# Altium PCB cw312_xc7a35t.PcbDoc (part 1 of 2)
Units mm, origin at the board's own origin, x right, y up, seen from the top; angles counter-clockwise.
Board outline 58.68 x 53.69 mm, 4 copper layers (Top Layer, Layer 1, Layer 2, Bottom Layer), stack 0.603 mm thick; 60 components, 62 nets, 545 pads, 207 vias.
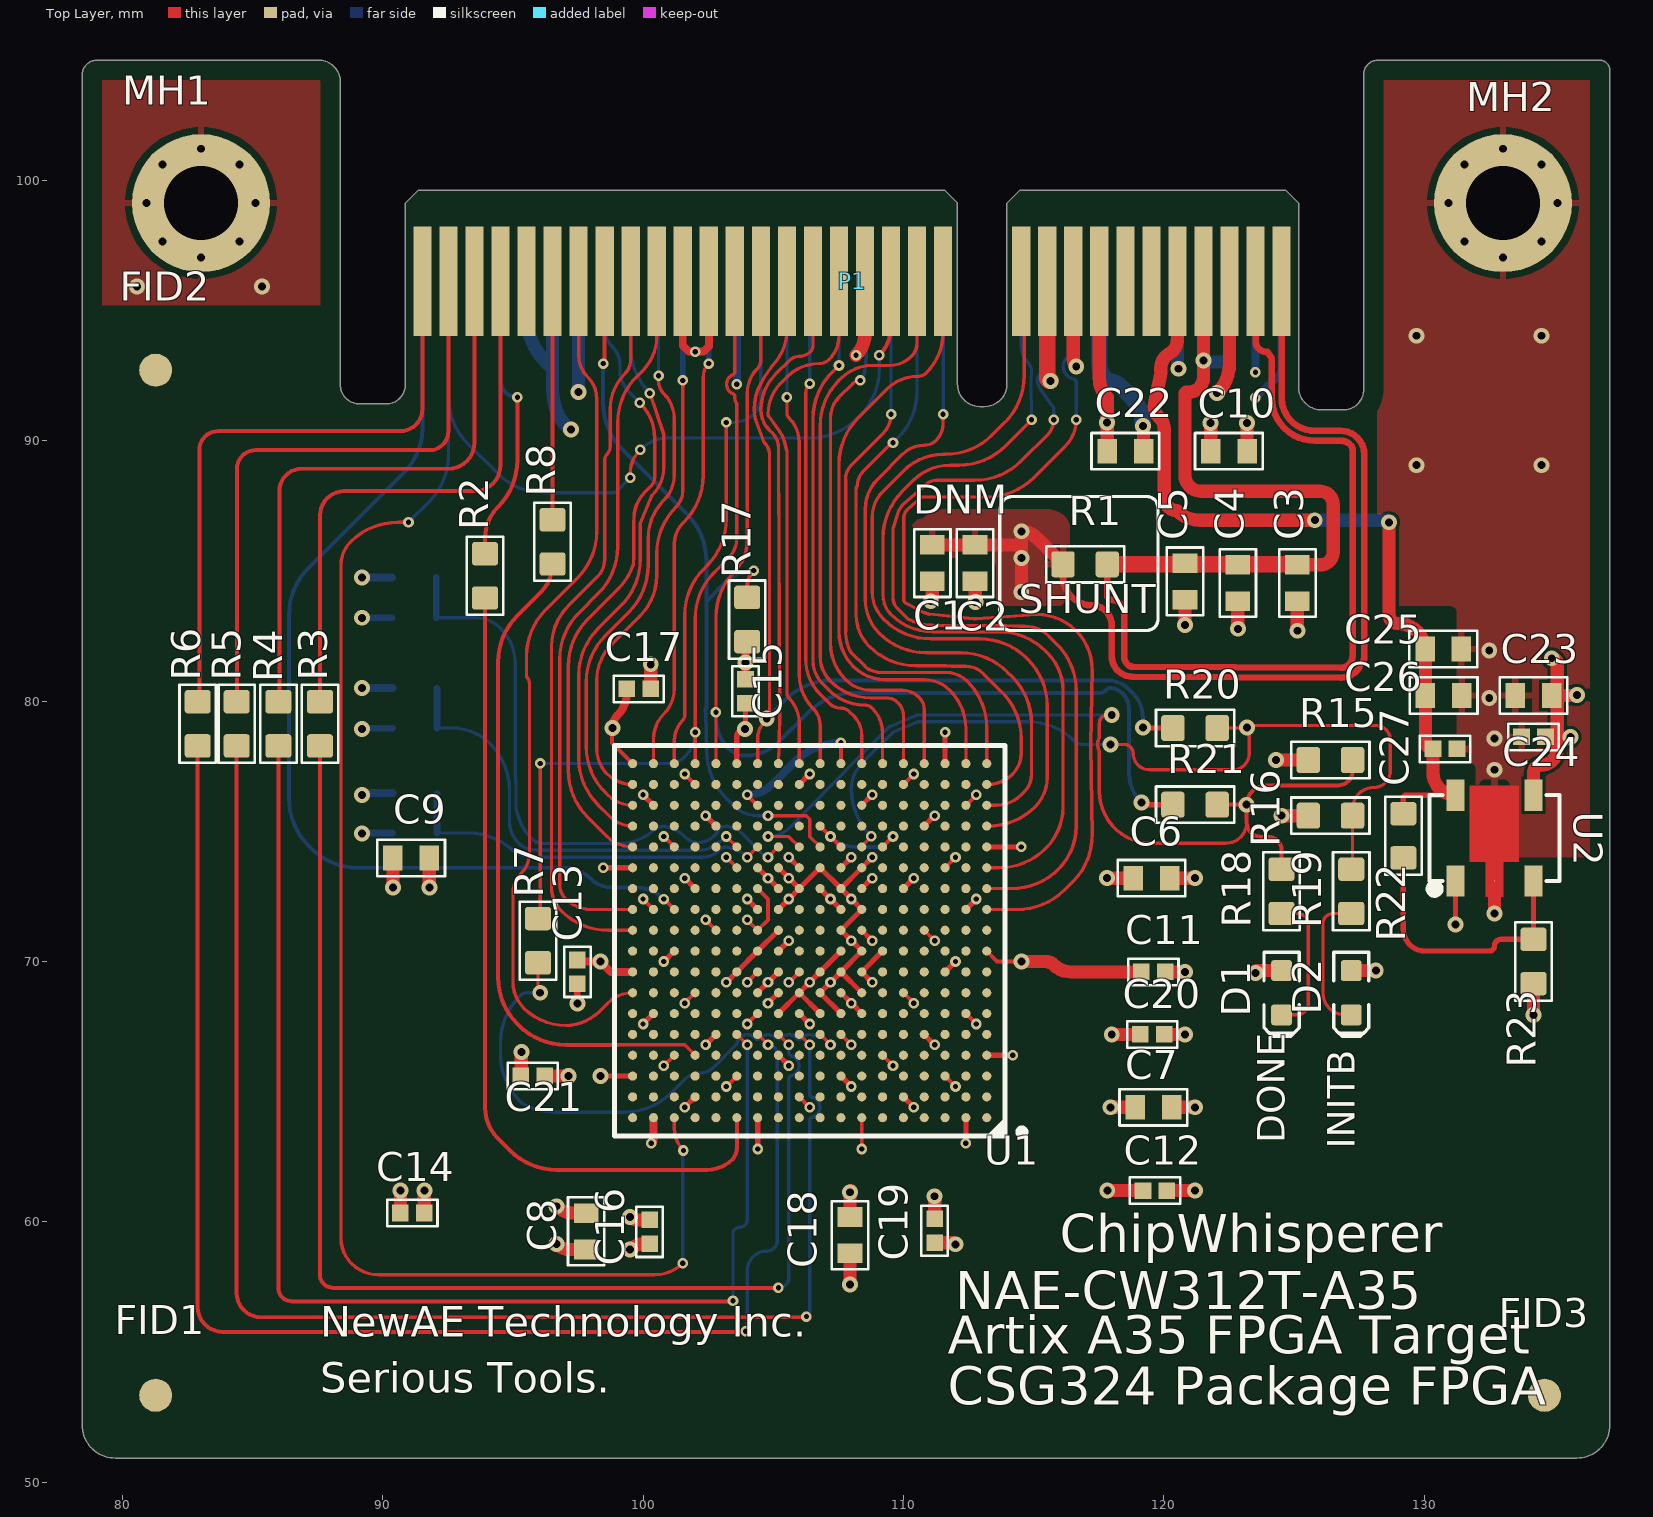
[diagram p0: Top Layer view]
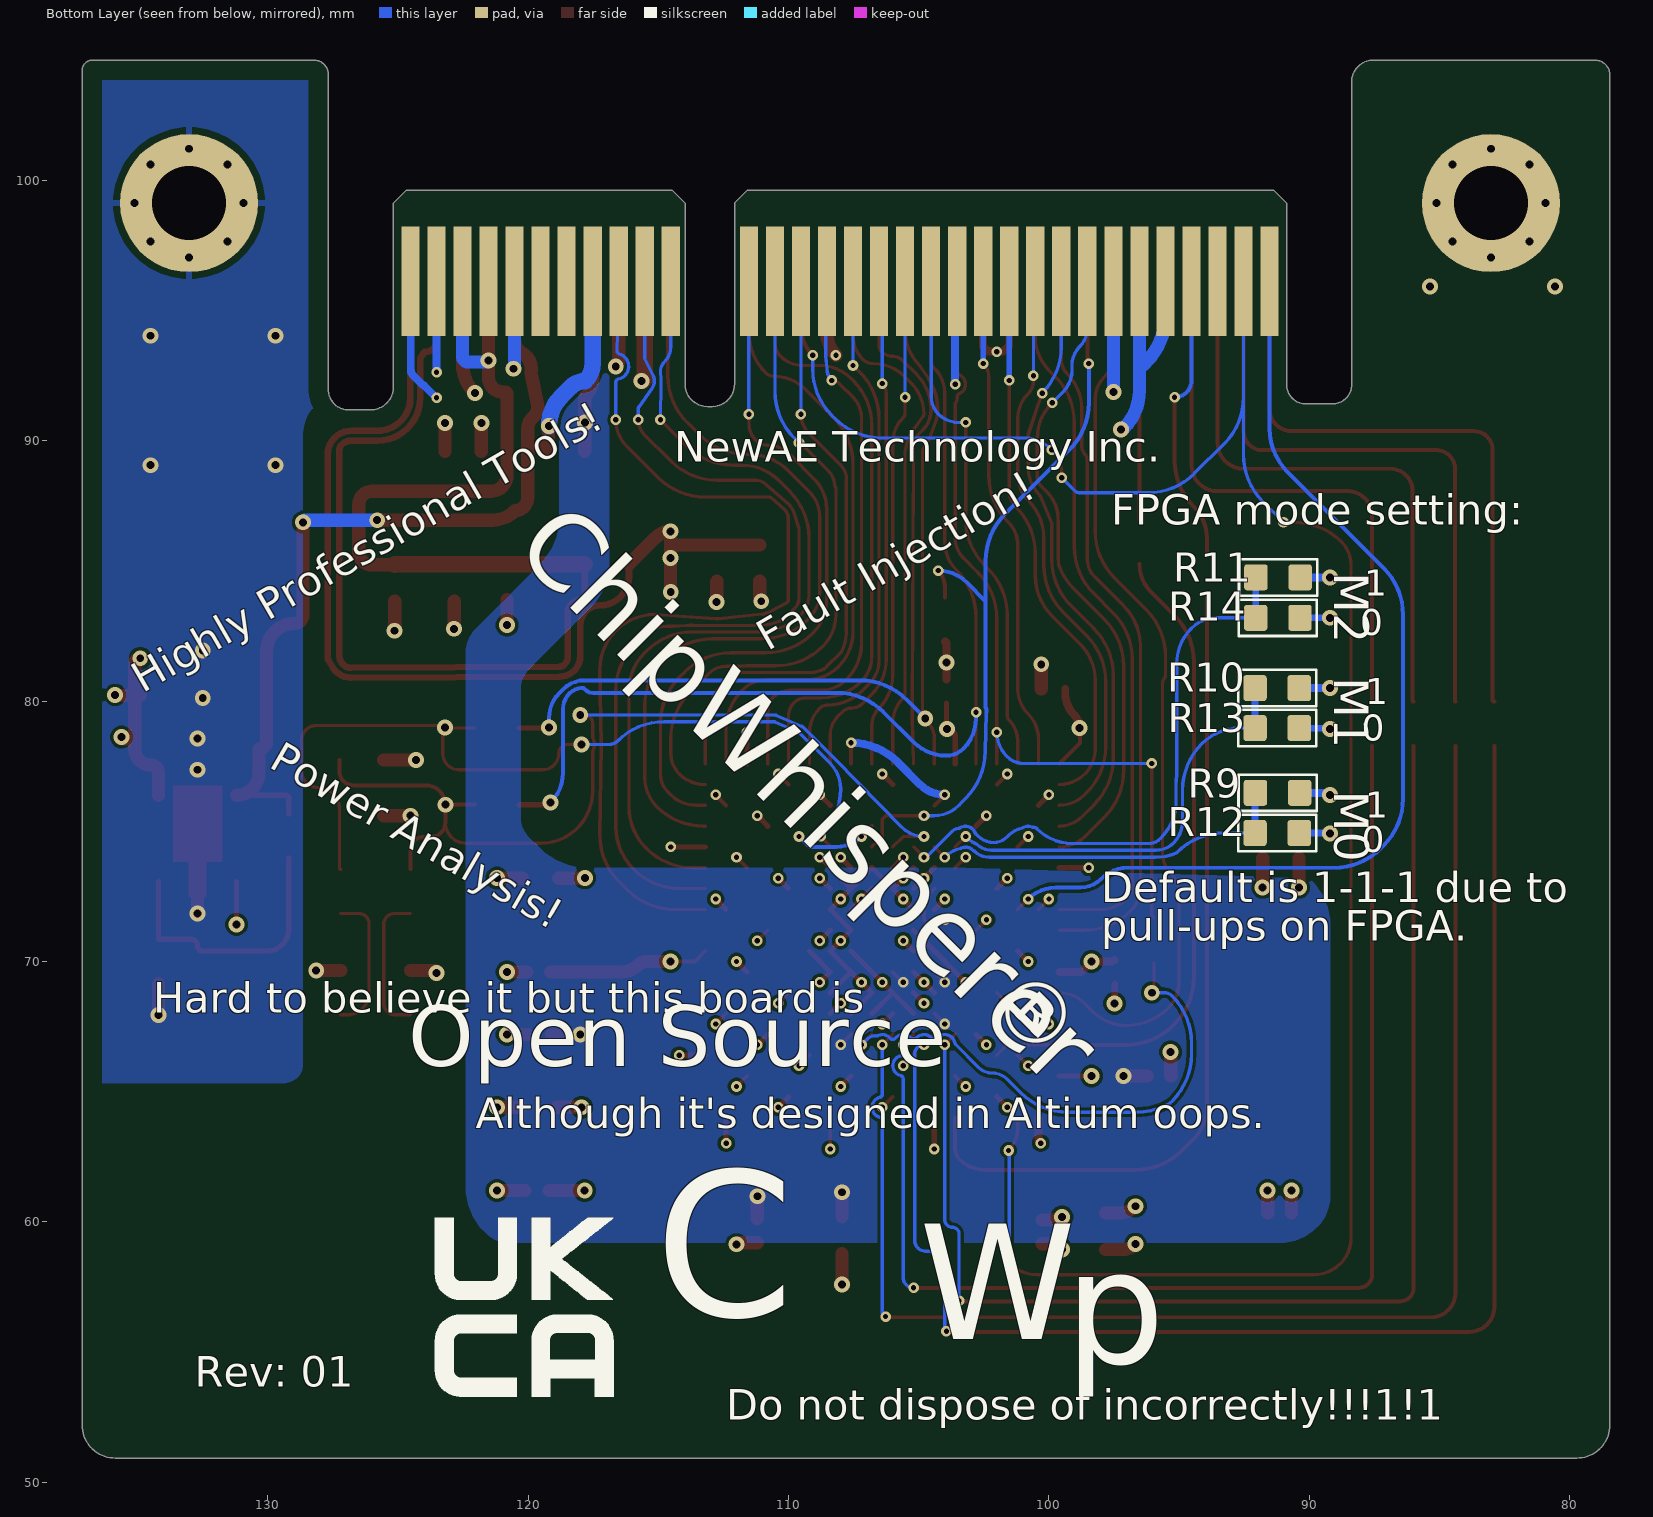
[diagram p1: Bottom Layer view, seen from below]
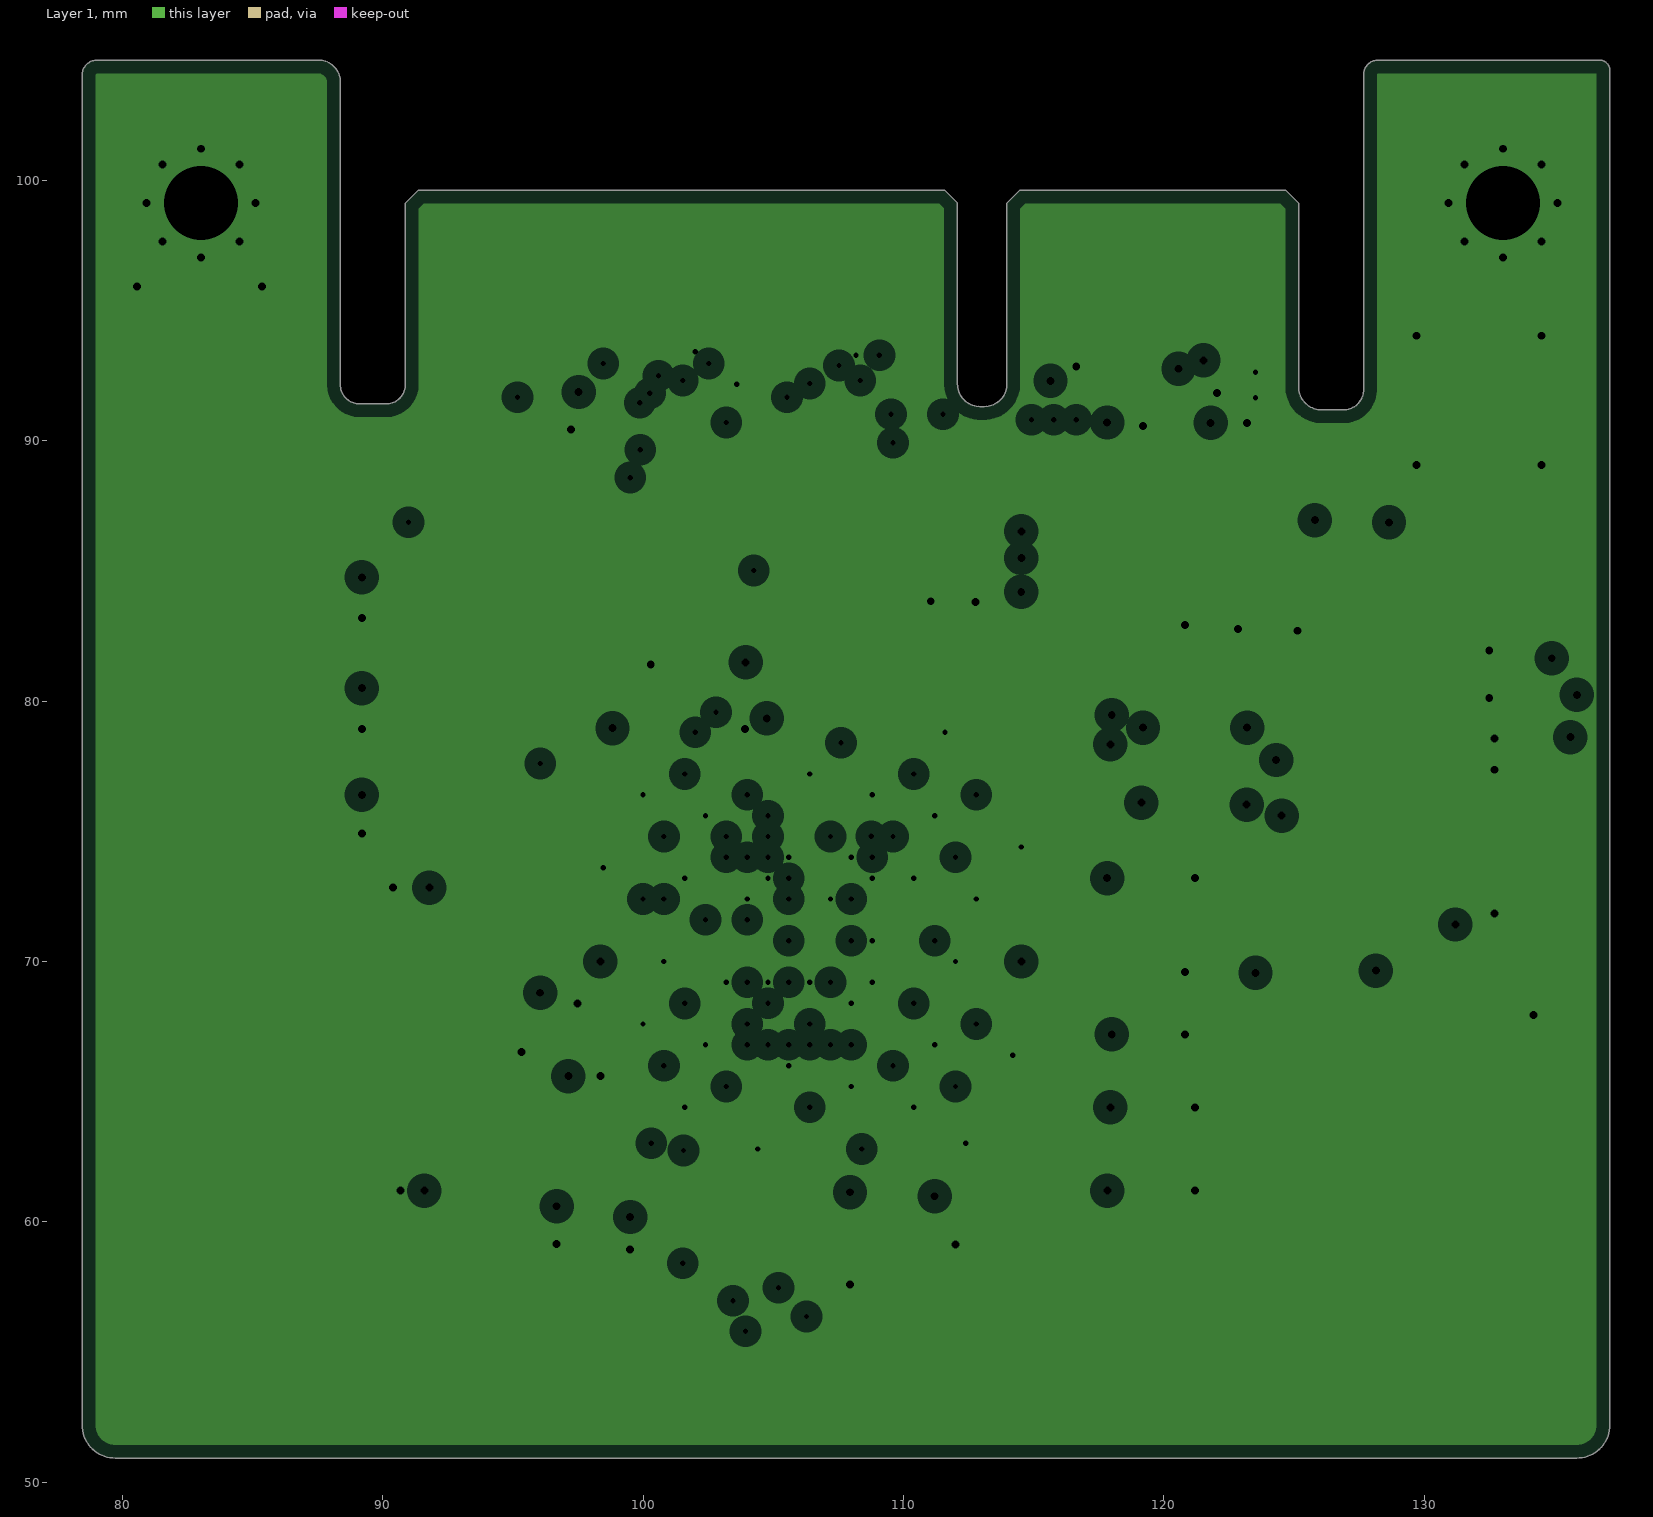
[diagram p2: Layer 1, clearances drawn from the general rule]
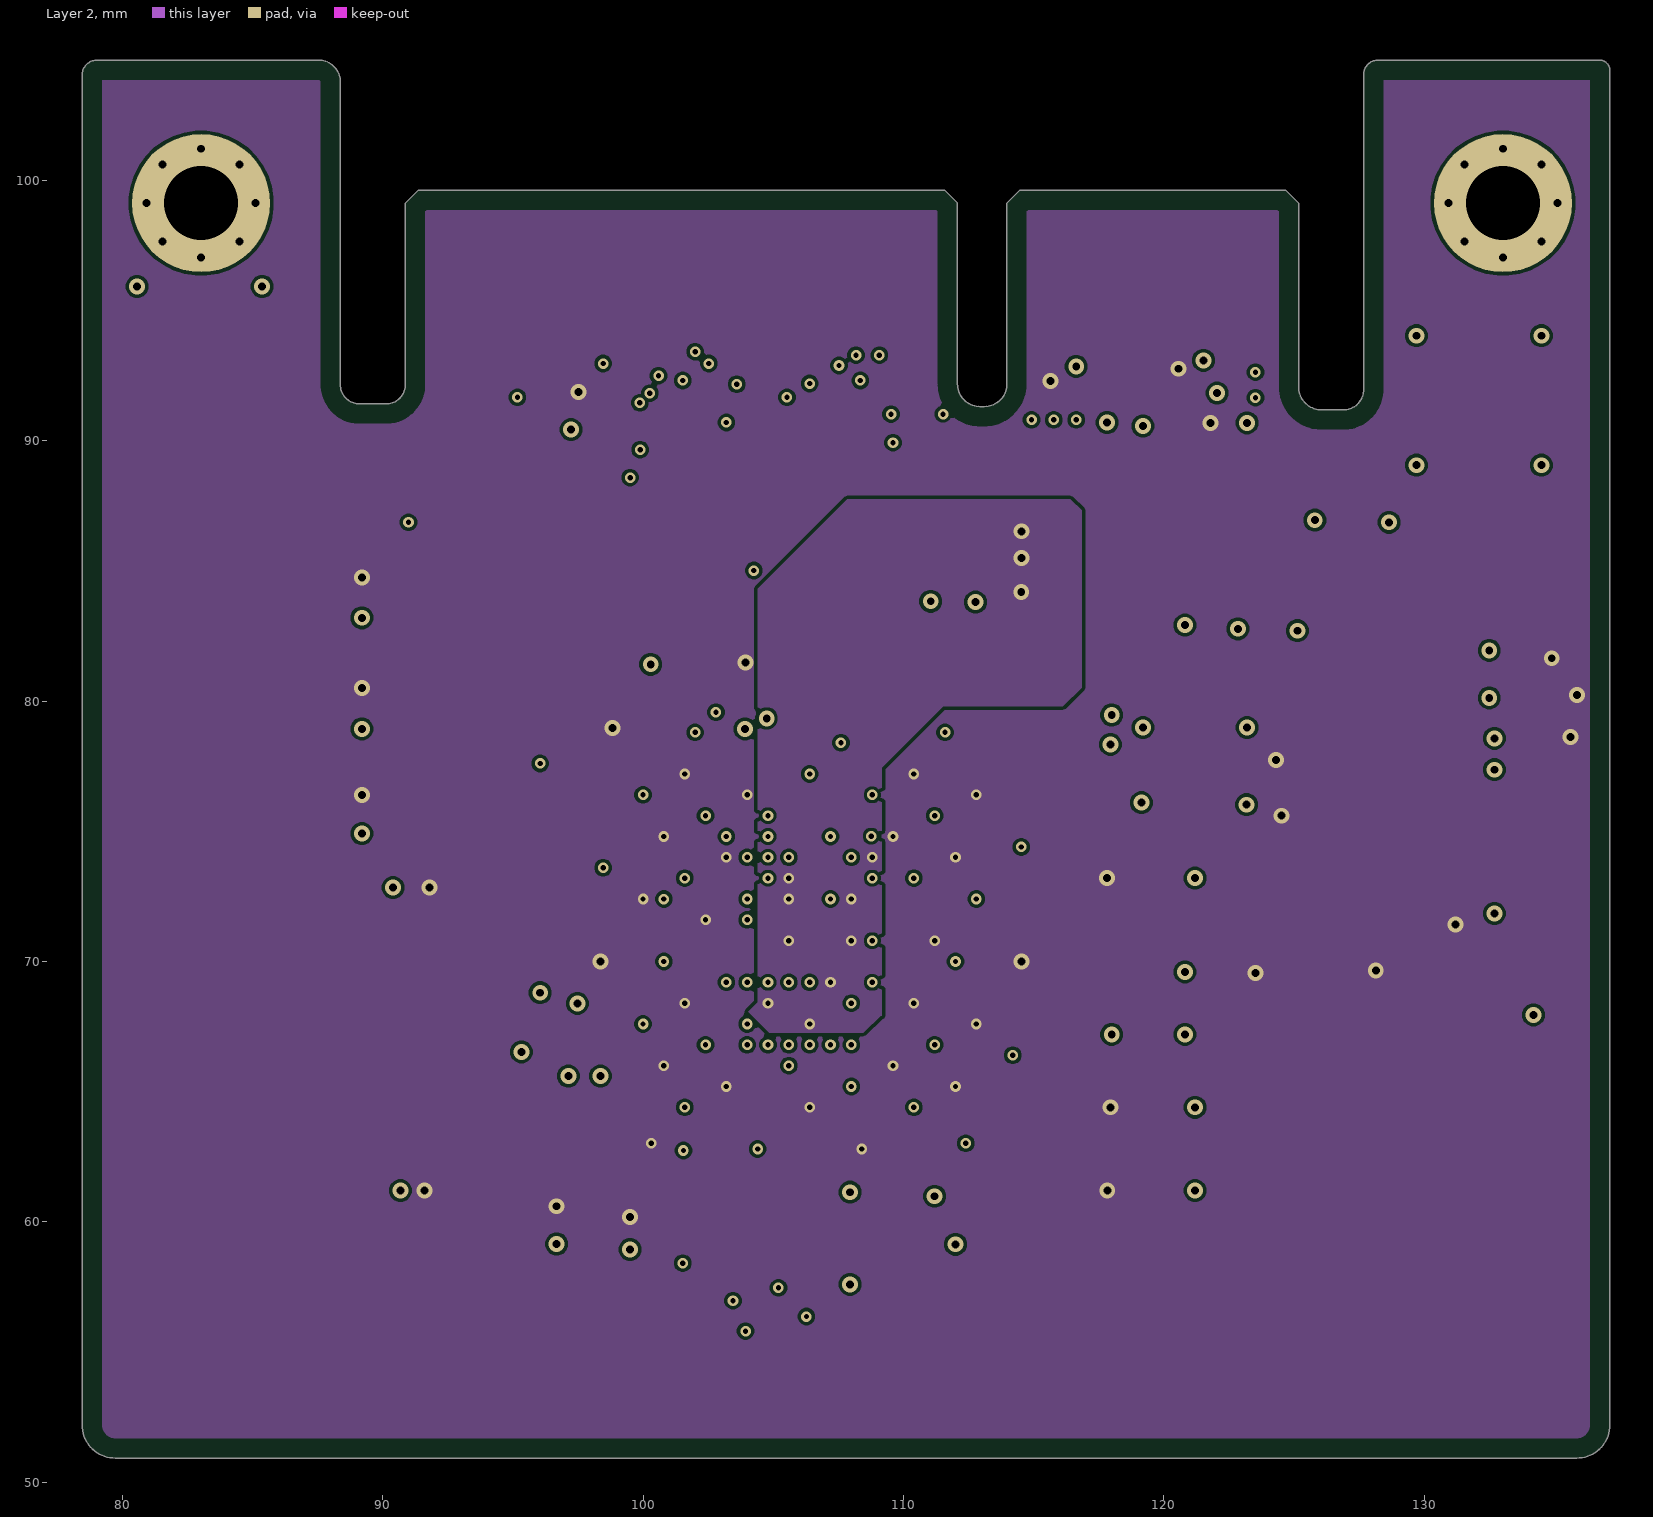
[diagram p3: Layer 2]
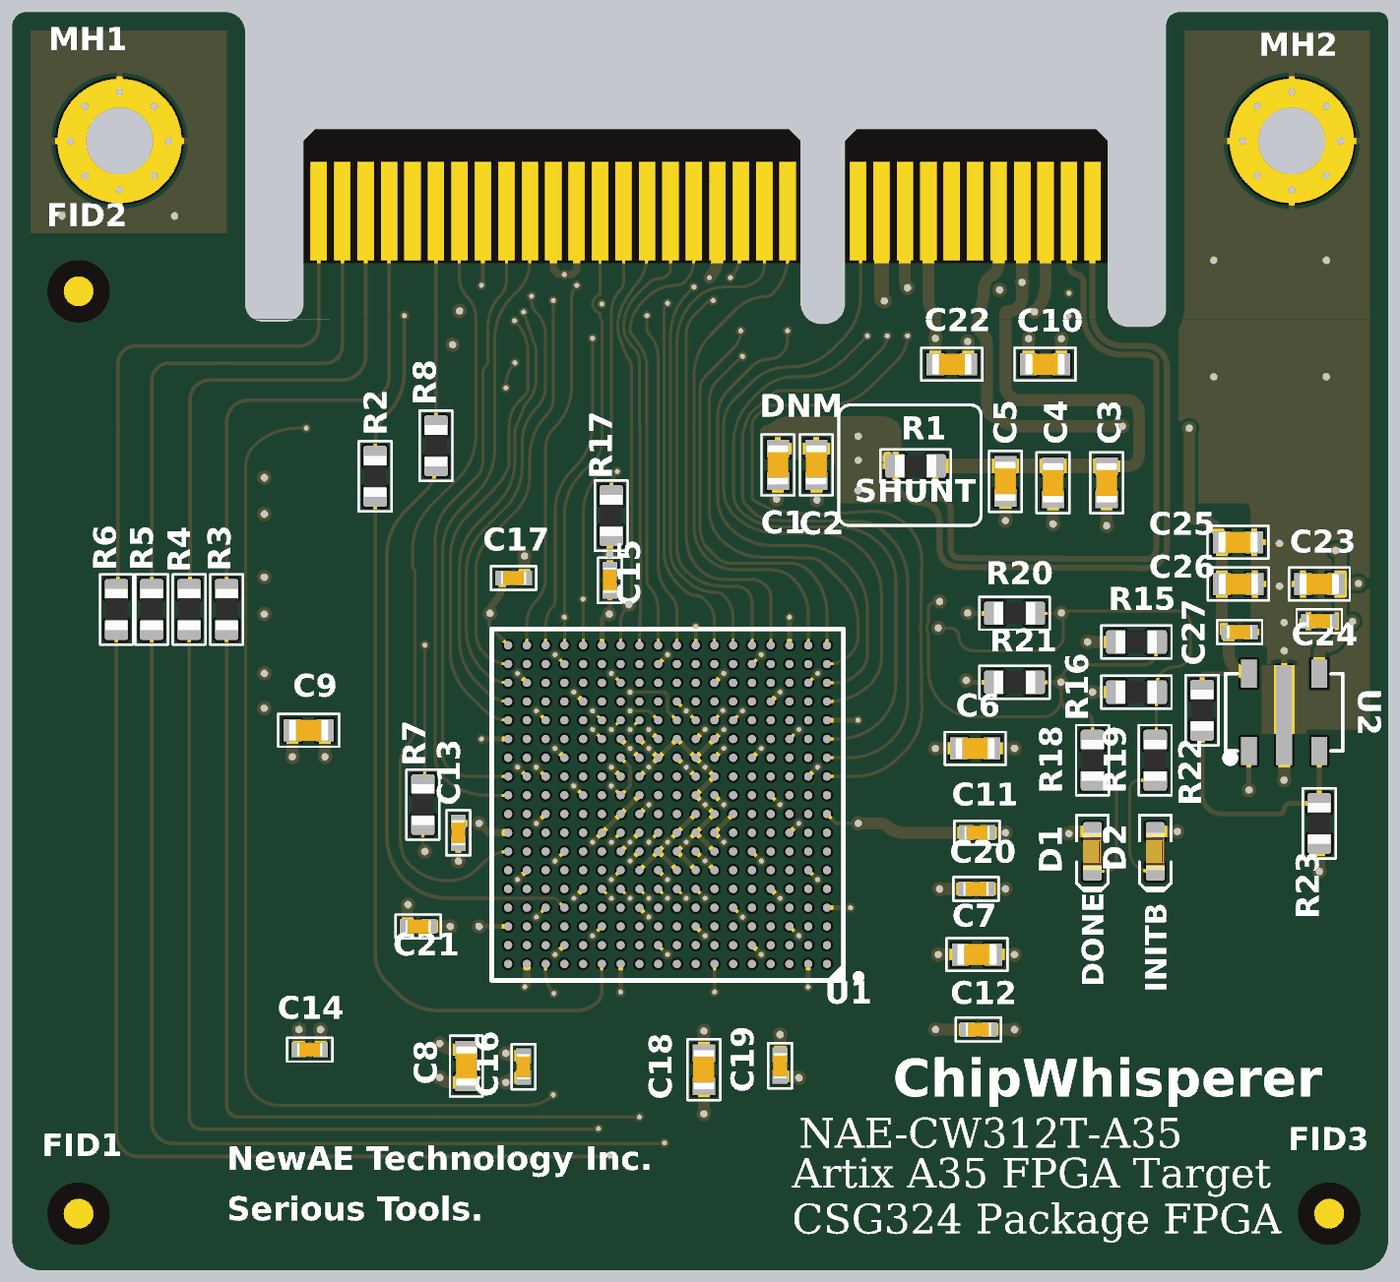
[diagram p5: 3D render of the assembled board from above, using the file's embedded part models]
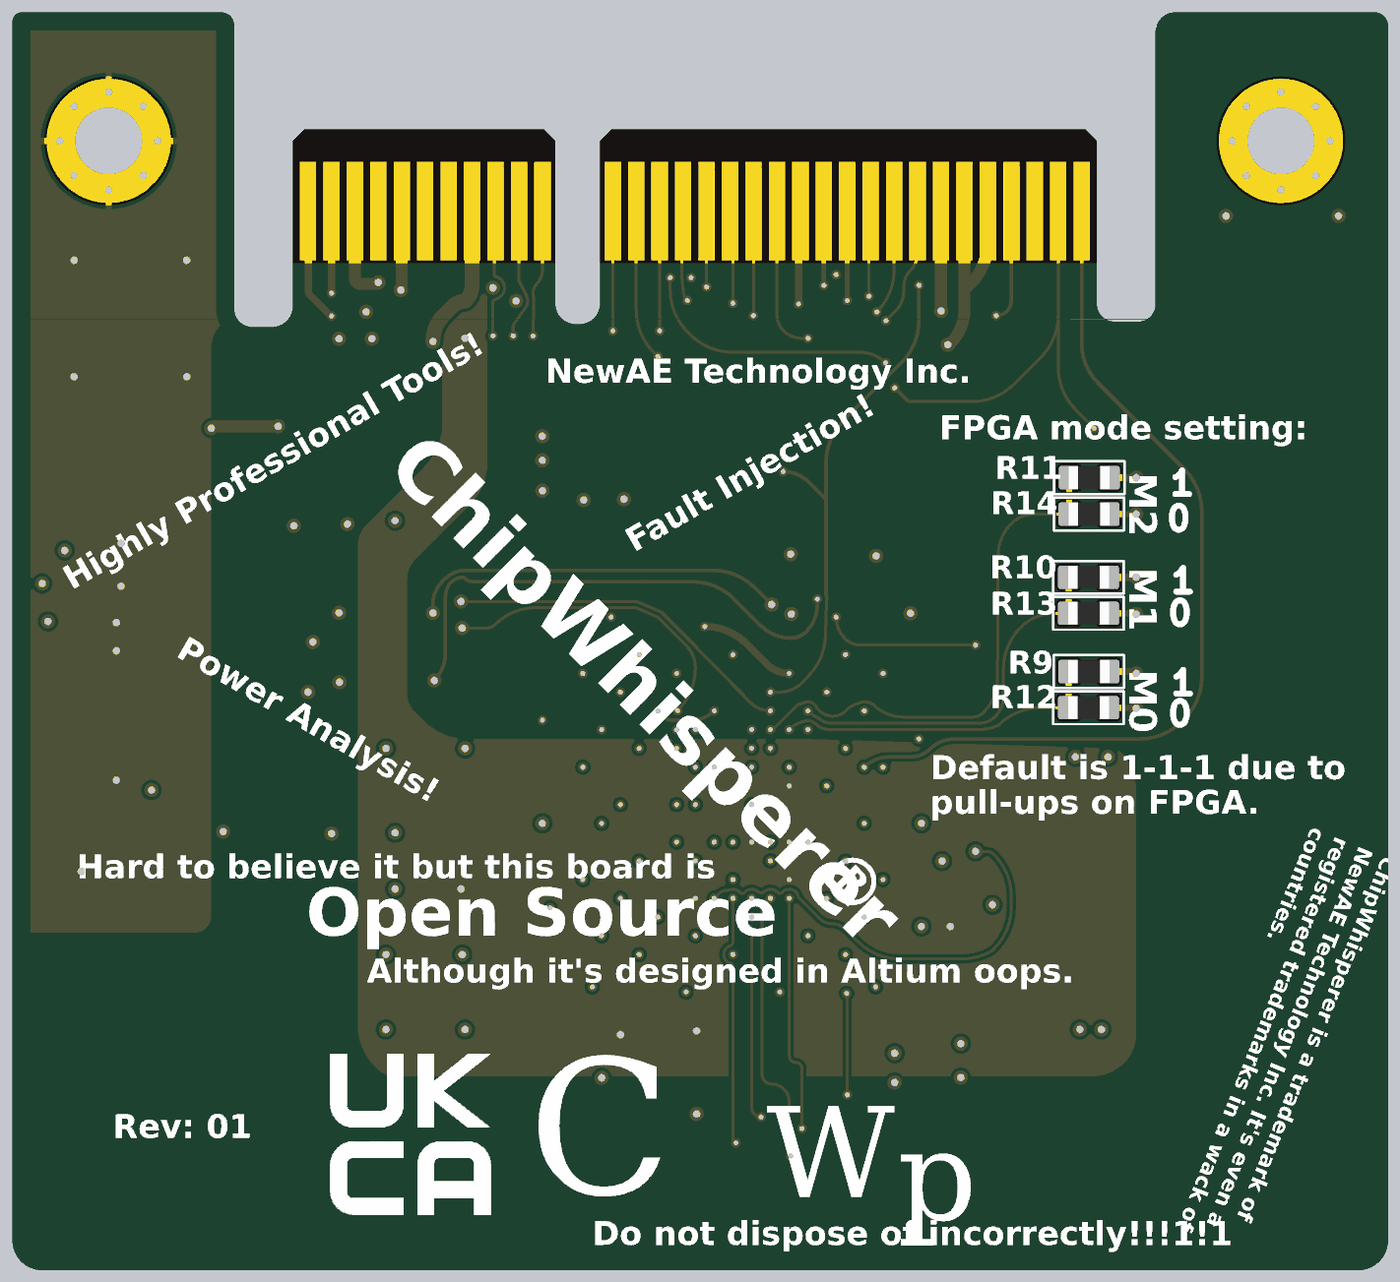
[diagram p6: 3D render of the assembled board from below, using the file's embedded part models]

## Layer stack, top to bottom
Top Solder: solder mask 0.0102, Solder Resist, Dk 3.5
Top Layer: signal copper 0.0356
Dielectric 2: prepreg 0.0711, PP-006, Dk 4.1
Layer 1: plane copper 0.035, net GND
Dielectric 1: dielectric 0.32, FR-4, Dk 4.8
Layer 2: signal copper 0.035
Dielectric 3: prepreg 0.0711, PP-006, Dk 4.1
Bottom Layer: signal copper 0.0356
Bottom Solder: solder mask 0.0102, Solder Resist, Dk 3.5

## Board outline
78.457,52.197 ccw(c79.727,52.197) 79.727,50.927 135.862,50.927 ccw(c135.862,52.197) 137.132,52.197 137.132,104.218 ccw(c136.732,104.218) 136.732,104.618 128.232,104.618 ccw(c128.232,104.061) 127.675,104.061 127.675,91.961 cw(c126.9,91.961) 126.9,91.186 126.064,91.186 cw(c126.064,92.075) 125.175,92.075 125.175,99.127 124.675,99.627 114.475,99.627 113.975,99.127 113.975,92.177 cw(c113.111,92.177) 113.111,91.313 112.939,91.313 cw(c112.939,92.177) 112.075,92.177 112.075,99.127 111.575,99.627 91.375,99.627 90.875,99.127 90.875,92.161 cw(c90.128,92.161) 90.128,91.415 89.114,91.415 cw(c89.114,92.153) 88.375,92.153 88.375,103.775 ccw(c87.532,103.775) 87.532,104.618 79.032,104.618 ccw(c79.032,104.043) 78.457,104.043

## Design rules (kind name [scope] priority, off if disabled: settings)
BoardOutlineClearance Silk_to_Outline [(OnLayer('Top Overlay'))] p1: gap=0 ignorepadtopadclearanceinfootprint=FALSE
BoardOutlineClearance [All] p2: gap=0.762 ignorepadtopadclearanceinfootprint=FALSE except(0.127: Track-OutlineEdge Track-CavityEdge Track-CutoutEdge Track-SplitBarrior Track-SplitContinuation SMDPad-OutlineEdge SMDPad-CavityEdge SMDPad-CutoutEdge SMDPad-SplitBarrior SMDPad-SplitContinuation)
Clearance [All] p1: gap=0.127 ignorepadtopadclearanceinfootprint=FALSE
HoleSize [All] p1: absolutevalues=TRUE maxlimit=5.08 minlimit=0.025 maxpercent=80.000 minpercent=20.000
MinimumSolderMaskSliver [All] p1: minsoldermaskwidth=0.127
PlaneClearance [All] p1: clearance=0.508
PlaneConnect PlaneConnect_viaDirect [IsVia] p1: planeconnectstyle=Direct reliefexpansion=0.508 reliefentries=4 reliefconductorwidth=0.254 reliefairgap=0.254
PlaneConnect [All] p2: planeconnectstyle=Relief reliefexpansion=0.508 reliefentries=4 reliefconductorwidth=0.254 reliefairgap=0.254
PolygonConnect PolygonConnect_viaDirect [All vs isVia] p1: connectstyle=Direct reliefconductorwidth=0.254 reliefentries=4 polygonreliefangle="90 Angle" airgapwidth=0.254
PolygonConnect [All] p2: connectstyle=Relief reliefconductorwidth=0.254 reliefentries=4 polygonreliefangle="90 Angle" airgapwidth=0.254
RoutingVias [All] p1: holewidth=0.203 width=0.406 viastyle="Through Hole" minholewidth=0.203 minwidth=0.406 maxholewidth=2.54 maxwidth=5.08 useviatemplates=TRUE viatemplateguid#1={C9B3ED78-813B-49D6-9E3A-DFB12ABB6989} viatemplateguid#2={154E6A83-3B22-4FBC-87DC-4FF27CD40F8F} viatemplateguid#3={D34D7AB9-3024-4146-83E3-B5961C51509C} viatemplatename#1=v41h20 viatemplatename#2=v41h20m41 viatemplatename#3=v61h30m0mx0
SilkToSilkClearance [All] p1: silktosilkclearance=0.127
SilkToSolderMaskClearance [IsPad] p1: minsilkscreentomaskgap=0.127 clearancetoexposedcopper=TRUE
SolderMaskExpansion [All] p1: expansion=0.102 istentingtop=FALSE
Width [All] p1: maxlimit=2.54 minlimit=0.127 preferedwidth=0.254 toplayer_prefwidth=0.152 midlayer1_minwidth=0.254 midlayer1_maxwidth=0.254 bottomlayer_prefwidth=0.152 minimp=50.000000 maximp=50.000000 favimp=50.000000
24 further rules are at their usual default settings.

## Classes and differential pairs
component class cw312_xc7a35t_fpga_cfg: D1 D2 R3 R4 R5 R6 R7 R9 R10 R11 R12 R13 R14 R15 R16 R17 R18 R19
component class cw312_xc7A35t_fpga_io1: R2 R8 U1
component class cw312_xc7a35t_cardedge: C23 C24 C25 C26 C27 MH1 MH2 P1 R20 R21 R22 R23 U2
component class cw312_xc7a35t_fpga_pwr: C1 C2 C3 C4 C5 C6 C7 C8 C9 C10 C11 C12 C13 C14 C15 C16 C17 C18 C19 C20 C21 C22 C? FID1 FID2 FID3 R1 R?

## Components (designator, comment, footprint, x,y, rotation, side; value= is the part's Value field where it differs from the comment)
C1 "DNM" CAPC0603_M 111.11,85.3 r270 top value=100n
C2 "DNM" CAPC0603_M 112.745,85.3 r270 top value=100n
C3 "100n" CAPC0603_M 125.129,84.535 r270 top
C4 "100n" CAPC0603_M 122.843,84.535 r270 top
C5 "2u2" CAPC0603_M 120.811,84.6 r270 top
C6 "2u2" CAPC0603_M 119.525,73.2 r0 top
C7 "2u2" CAPC0603_M 119.6,64.4 r0 top
C8 "2u2" CAPC0603_M 97.815,59.639 r270 top
C9 "2u2" CAPC0603_M 91.092,73.971 r180 top
C10 "2u2" CAPC0603_M 122.5,89.6 r0 top
C11 "100n" CAPC0402_M 119.6,69.6 r0 top
C12 "100n" CAPC0402_M 119.66,61.2 r0 top
C13 "100n" CAPC0402_M 97.478,69.6 r270 top
C14 "100n" CAPC0402_M 91.14,60.339 r180 top
C15 "100n" CAPC0402_M 103.937,80.378 r270 top
C16 "100n" CAPC0402_M 100.254,59.617 r270 top
C17 "100n" CAPC0402_M 99.834,80.47 r0 top
C18 "2u2" CAPC0603_M 107.95,59.487 r270 top
C19 "100n" CAPC0402_M 111.2,59.659 r270 top
C20 "100n" CAPC0402_M 119.558,67.2 r0 top
C21 "100n" CAPC0402_M 95.766,65.6 r180 top
C22 "2u2" CAPC0603_M 118.525,89.6 r0 top
C23 "2u2" CAPC0603_M 134.2,80.214 r180 top
C24 "100n" CAPC0402_M 134.2,78.629 r180 top
C25 "2u2" CAPC0603_M 130.733,81.998 r0 top
C26 "2u2" CAPC0603_M 130.749,80.214 r0 top
C27 "100n" CAPC0402_M 130.8,78.166 r0 top
D1 "LED, 0603, Red" LED-0603-RED 124.525,68.8 r270 top
D2 "LED, 0603, Red" LED-0603-RED 127.2,68.8 r270 top
FID1 "FIDU-ROUND-1.0MM" FIDU-ROUND-1.0mm#1 81.153,53.34 r0 top
FID2 "FIDU-ROUND-1.0MM" FIDU-ROUND-1.0mm#2 81.549,93.049 r0 top
FID3 "FIDU-ROUND-1.0MM" FIDU-ROUND-1.0mm#3 134.239,53.594 r0 top
MH1 "4-40 MH, Tight Fit" MOUNT_#4_TIGHT 83.025,99.127 r0 top
MH2 "4-40 MH, Tight Fit" MOUNT_#4_TIGHT 133.025,99.127 r0 top
P1 "PCIeX4-GF-2D-1000-1K-O64" PCIeX4-GF-2D-1000-1K-O64 115.025,96.127 r180 top
R1 "10R" RESC1608X55N 116.98,85.255 r0 top
R2 "10R" RESC1608X55N 93.929,84.811 r270 top
R3 "10R" RESC1608X55N 87.594,79.13 r270 top
R4 "10R" RESC1608X55N 85.994,79.13 r270 top
R5 "10R" RESC1608X55N 84.394,79.13 r270 top
R6 "10R" RESC1608X55N 82.895,79.13 r270 top
R7 "10R" RESC1608X55N 95.966,70.8 r270 top
R8 "10R" RESC1608X55N 96.525,86.116 r270 top
R9 "DNM RCHIP" RESC1608X55N 91.219,76.48 r180 bottom
R10 "DNM RCHIP" RESC1608X55N 91.234,80.502 r180 bottom
R11 "DNM RCHIP" RESC1608X55N 91.201,84.755 r180 bottom
R12 "DNM RCHIP" RESC1608X55N 91.234,74.937 r0 bottom
R13 "DNM RCHIP" RESC1608X55N 91.234,78.966 r0 bottom
R14 "DNM RCHIP" RESC1608X55N 91.209,83.2 r0 bottom
R15 "4k7" RESC1608X55N 126.4,77.74 r0 top
R16 "4k7" RESC1608X55N 126.4,75.6 r0 top
R17 "4k7" RESC1608X55N 104,83.134 r90 top
R18 "1k" RESC1608X55N 124.525,72.694 r270 top
R19 "1k" RESC1608X55N 127.2,72.694 r270 top
R20 "10k" RESC1608X55N 121.2,78.966 r180 top
R21 "10k" RESC1608X55N 121.2,76.022 r180 top
R22 "DNM RCHIP" RESC1608X55N 129.2,74.828 r270 top
R23 "DNM RCHIP" RESC1608X55N 134.2,70 r270 top
U1 "XC7A35T-1CSG324C" CSG324 106.4,70.8 r180 top
U2 "AP7361C-Y5-13" SOT89-5 131.2,73.089 r0 top

## Footprints (in the part's own frame and the unit in brackets; to place one, negate y for a bottom-side part, rotate by r counter-clockwise, add the part's x,y. Pads: shape width x height; smd on the part's side, far side on the other; paste and mask are expansions set on the pad)
CAPC0402_M [mm] "Chip Capacitor, 2-Leads, Body 0402, IPC Medium Density"
  rect 0.64x0.64 smd mask+0.06: 1(-0.46,0) 2(0.46,0)
  silkscreen extent -0.97,-0.51 0.97,0.51, body extent -0.55,-0.3 0.55,0.3, height 0.6
CAPC0603_M [mm]
  rect 0.75x0.95 smd: 1(-0.7,0) 2(0.7,0)
  silkscreen extent -1.3,-0.7 1.3,0.7, body extent -0.85,-0.45 0.85,0.45, height 0.9
CSG324 [mm] "BGA, 324-Balls, Body 15x15mm, Pitch 0.8mm"
  round 0.35 smd: A1(-6.8,6.8) A2(-6,6.8) A3(-5.2,6.8) A4(-4.4,6.8) A5(-3.6,6.8) A6(-2.8,6.8) A7(-2,6.8) A8(-1.2,6.8) A9(-0.4,6.8) A10(0.4,6.8) A11(1.2,6.8) A12(2,6.8) A13(2.8,6.8) A14(3.6,6.8) A15(4.4,6.8) A16(5.2,6.8) A17(6,6.8) A18(6.8,6.8) B1(-6.8,6) B2(-6,6) B3(-5.2,6) B4(-4.4,6) B5(-3.6,6) B6(-2.8,6) B7(-2,6) B8(-1.2,6) B9(-0.4,6) B10(0.4,6) B11(1.2,6) B12(2,6) B13(2.8,6) B14(3.6,6) B15(4.4,6) B16(5.2,6) B17(6,6) B18(6.8,6) C1(-6.8,5.2) C2(-6,5.2) C3(-5.2,5.2) C4(-4.4,5.2) C5(-3.6,5.2) C6(-2.8,5.2) C7(-2,5.2) C8(-1.2,5.2) C9(-0.4,5.2) C10(0.4,5.2) C11(1.2,5.2) C12(2,5.2) C13(2.8,5.2) C14(3.6,5.2) C15(4.4,5.2) C16(5.2,5.2) C17(6,5.2) C18(6.8,5.2) D1(-6.8,4.4) D2(-6,4.4) D3(-5.2,4.4) D4(-4.4,4.4) D5(-3.6,4.4) D6(-2.8,4.4) D7(-2,4.4) D8(-1.2,4.4) D9(-0.4,4.4) D10(0.4,4.4) D11(1.2,4.4) D12(2,4.4) D13(2.8,4.4) D14(3.6,4.4) D15(4.4,4.4) D16(5.2,4.4) D17(6,4.4) D18(6.8,4.4) E1(-6.8,3.6) E2(-6,3.6) E3(-5.2,3.6) E4(-4.4,3.6) E5(-3.6,3.6) E6(-2.8,3.6) E7(-2,3.6) E8(-1.2,3.6) E9(-0.4,3.6) E10(0.4,3.6) E11(1.2,3.6) E12(2,3.6) E13(2.8,3.6) E14(3.6,3.6) E15(4.4,3.6) E16(5.2,3.6) E17(6,3.6) E18(6.8,3.6) F1(-6.8,2.8) F2(-6,2.8) F3(-5.2,2.8) F4(-4.4,2.8) F5(-3.6,2.8) F6(-2.8,2.8) F7(-2,2.8) F8(-1.2,2.8) F9(-0.4,2.8) F10(0.4,2.8) F11(1.2,2.8) F12(2,2.8) F13(2.8,2.8) F14(3.6,2.8) F15(4.4,2.8) F16(5.2,2.8) F17(6,2.8) F18(6.8,2.8) G1(-6.8,2) G2(-6,2) G3(-5.2,2) G4(-4.4,2) G5(-3.6,2) G6(-2.8,2) G7(-2,2) G8(-1.2,2) G9(-0.4,2) G10(0.4,2) G11(1.2,2) G12(2,2) G13(2.8,2) G14(3.6,2) G15(4.4,2) G16(5.2,2) G17(6,2) G18(6.8,2) H1(-6.8,1.2) H2(-6,1.2) H3(-5.2,1.2) H4(-4.4,1.2) H5(-3.6,1.2) H6(-2.8,1.2) H7(-2,1.2) H8(-1.2,1.2) H9(-0.4,1.2) H10(0.4,1.2) H11(1.2,1.2) H12(2,1.2) H13(2.8,1.2) H14(3.6,1.2) H15(4.4,1.2) H16(5.2,1.2) H17(6,1.2) H18(6.8,1.2) J1(-6.8,0.4) J2(-6,0.4) J3(-5.2,0.4) J4(-4.4,0.4) J5(-3.6,0.4) J6(-2.8,0.4) J7(-2,0.4) J8(-1.2,0.4) J9(-0.4,0.4) J10(0.4,0.4) J11(1.2,0.4) J12(2,0.4) J13(2.8,0.4) J14(3.6,0.4) J15(4.4,0.4) J16(5.2,0.4) J17(6,0.4) J18(6.8,0.4) K1(-6.8,-0.4) K2(-6,-0.4) K3(-5.2,-0.4) K4(-4.4,-0.4) K5(-3.6,-0.4) K6(-2.8,-0.4) K7(-2,-0.4) K8(-1.2,-0.4) K9(-0.4,-0.4) K10(0.4,-0.4) K11(1.2,-0.4) K12(2,-0.4) K13(2.8,-0.4) K14(3.6,-0.4) K15(4.4,-0.4) K16(5.2,-0.4) K17(6,-0.4) K18(6.8,-0.4) L1(-6.8,-1.2) L2(-6,-1.2) L3(-5.2,-1.2) L4(-4.4,-1.2) L5(-3.6,-1.2) L6(-2.8,-1.2) L7(-2,-1.2) L8(-1.2,-1.2) L9(-0.4,-1.2) L10(0.4,-1.2) L11(1.2,-1.2) L12(2,-1.2) L13(2.8,-1.2) L14(3.6,-1.2) L15(4.4,-1.2) L16(5.2,-1.2) L17(6,-1.2) L18(6.8,-1.2) M1(-6.8,-2) M2(-6,-2) M3(-5.2,-2) M4(-4.4,-2) M5(-3.6,-2) M6(-2.8,-2) M7(-2,-2) M8(-1.2,-2) M9(-0.4,-2) M10(0.4,-2) M11(1.2,-2) M12(2,-2) M13(2.8,-2) M14(3.6,-2) M15(4.4,-2) M16(5.2,-2) M17(6,-2) M18(6.8,-2) N1(-6.8,-2.8) N2(-6,-2.8) N3(-5.2,-2.8) N4(-4.4,-2.8) N5(-3.6,-2.8) N6(-2.8,-2.8) N7(-2,-2.8) N8(-1.2,-2.8) N9(-0.4,-2.8) N10(0.4,-2.8) N11(1.2,-2.8) N12(2,-2.8) N13(2.8,-2.8) N14(3.6,-2.8) N15(4.4,-2.8) N16(5.2,-2.8) N17(6,-2.8) N18(6.8,-2.8) P1(-6.8,-3.6) P2(-6,-3.6) P3(-5.2,-3.6) P4(-4.4,-3.6) P5(-3.6,-3.6) P6(-2.8,-3.6) P7(-2,-3.6) P8(-1.2,-3.6) P9(-0.4,-3.6) P10(0.4,-3.6) P11(1.2,-3.6) P12(2,-3.6) P13(2.8,-3.6) P14(3.6,-3.6) P15(4.4,-3.6) P16(5.2,-3.6) P17(6,-3.6) P18(6.8,-3.6) R1(-6.8,-4.4) R2(-6,-4.4) R3(-5.2,-4.4) R4(-4.4,-4.4) R5(-3.6,-4.4) R6(-2.8,-4.4) R7(-2,-4.4) R8(-1.2,-4.4) R9(-0.4,-4.4) R10(0.4,-4.4) R11(1.2,-4.4) R12(2,-4.4) R13(2.8,-4.4) R14(3.6,-4.4) R15(4.4,-4.4) R16(5.2,-4.4) R17(6,-4.4) R18(6.8,-4.4) T1(-6.8,-5.2) T2(-6,-5.2) T3(-5.2,-5.2) T4(-4.4,-5.2) T5(-3.6,-5.2) T6(-2.8,-5.2) T7(-2,-5.2) T8(-1.2,-5.2) T9(-0.4,-5.2) T10(0.4,-5.2) T11(1.2,-5.2) T12(2,-5.2) T13(2.8,-5.2) T14(3.6,-5.2) T15(4.4,-5.2) T16(5.2,-5.2) T17(6,-5.2) T18(6.8,-5.2) U1(-6.8,-6) U2(-6,-6) U3(-5.2,-6) U4(-4.4,-6) U5(-3.6,-6) U6(-2.8,-6) U7(-2,-6) U8(-1.2,-6) U9(-0.4,-6) U10(0.4,-6) U11(1.2,-6) U12(2,-6) U13(2.8,-6) U14(3.6,-6) U15(4.4,-6) U16(5.2,-6) U17(6,-6) U18(6.8,-6) V1(-6.8,-6.8) V2(-6,-6.8) V3(-5.2,-6.8) V4(-4.4,-6.8) V5(-3.6,-6.8) V6(-2.8,-6.8) V7(-2,-6.8) V8(-1.2,-6.8) V9(-0.4,-6.8) V10(0.4,-6.8) V11(1.2,-6.8) V12(2,-6.8) V13(2.8,-6.8) V14(3.6,-6.8) V15(4.4,-6.8) V16(5.2,-6.8) V17(6,-6.8) V18(6.8,-6.8)
  silkscreen extent -8.27,-7.5 7.5,7.5, body extent -7.5,-7.5 7.5,7.5, height 1.5
FIDU-ROUND-1.0mm#1 [mil]
  round 50 smd paste-78.74 mask+27.56: M1(5,0)
FIDU-ROUND-1.0mm#2 [mil]
  round 50 smd paste-78.74 mask+27.56: M1(-10.57,-13.35)
FIDU-ROUND-1.0mm#3 [mil]
  round 50 smd paste-78.74 mask+27.56: M1(15,-10)
LED-0603-RED [mm]
  round 0.254 on Mech15: 0(0,0)
  rrect25% 0.8x0.8 smd: A(-0.85,0) K(0.85,0)
  Top Layer pour cut-out: -0.5,0.5 0.5,0.5 0.5,-0.5 -0.5,-0.5
  silkscreen extent -1.55,-0.67 1.68,0.67, body extent -0.8,-0.4 0.8,0.4, height 0.75
MOUNT_#4_TIGHT [mil]
  round 14 hole 12: 1(-82.21,0) 1(-58.13,-58.13) 1(-58.13,58.13) 1(0,-82.21) 1(0,82.21) 1(0,82.21) 1(58.13,-58.13) 1(58.13,58.13) 1(82.21,0)
  round 208.66 hole 112.2: 1(0,0)
PCIeX4-GF-2D-1000-1K-O64 [mm] "Golden finger, PCIeX4, Dual, Opposite, Pitch 1mm, 64-Position"
  rect 0.7x4.2 smd far side paste-1: A1(-9.5,0) A2(-8.5,0) A3(-7.5,0) A4(-6.5,0) A5(-5.5,0) A6(-4.5,0) A7(-3.5,0) A8(-2.5,0) A9(-1.5,0) A10(-0.5,0) A11(0.5,0) A12(3.5,0) A13(4.5,0) A14(5.5,0) A15(6.5,0) A16(7.5,0) A17(8.5,0) A18(9.5,0) A19(10.5,0) A20(11.5,0) A21(12.5,0) A22(13.5,0) A23(14.5,0) A24(15.5,0) A25(16.5,0) A26(17.5,0) A27(18.5,0) A28(19.5,0) A29(20.5,0) A30(21.5,0) A31(22.5,0) A32(23.5,0)
  rect 0.7x4.2 smd paste-1: B1(-9.5,0) B2(-8.5,0) B3(-7.5,0) B4(-6.5,0) B5(-5.5,0) B6(-4.5,0) B7(-3.5,0) B8(-2.5,0) B9(-1.5,0) B10(-0.5,0) B11(0.5,0) B12(3.5,0) B13(4.5,0) B14(5.5,0) B15(6.5,0) B16(7.5,0) B17(8.5,0) B18(9.5,0) B19(10.5,0) B20(11.5,0) B21(12.5,0) B22(13.5,0) B23(14.5,0) B24(15.5,0) B25(16.5,0) B26(17.5,0) B27(18.5,0) B28(19.5,0) B29(20.5,0) B30(21.5,0) B31(22.5,0) B32(23.5,0)
RESC1608X55N [mm] "Chip Resistor, Body 1.6x0.8mm, EIA 0603, IPC Medium Density"
  round 0.254 on Mech15: 0(0,0)
  rrect25% 0.9x1 smd: 1(-0.85,0) 2(0.85,0)
  Top Layer pour cut-out: -0.6,0.5 0.6,0.5 0.6,-0.5 -0.6,-0.5
  silkscreen extent -1.5,-0.7 1.5,0.7, body extent -0.87,-0.47 0.88,0.48, height 0.54
SOT89-5 [mm]
  rect 0.68x1.2 smd: 1(0,0) 3(3,0) 4(3,3.3) 5(0,3.3)
  round 0.025 smd: 2(1.5,0)
  Top Layer region: 0.55,0.725 2.45,0.725 2.45,3.675 0.55,3.675
  Top Layer region: 1.16,-0.6 1.16,3.65 1.84,3.65 1.84,-0.6
  silkscreen extent -1,-0.44 4,3.3

## Part data
C1 C2: library part CCHIP-100n-0603, Case-EIA=0603, Case-Metric=1608, Manufacture 1=Kemet, Manufacture Part Number 1=C0603C104K5RACTU, Rated Voltage=50VDC, Supplier Part Number 1=399-5089-2-ND, Component Group=Capacitor, Component Type=Standard, Mounting Technology=SMT, Part Number=CCHIP-100n-0603, Pin Count=2, Supplier 1=Digi-Key
C3 C4: library part CCHIP-100n-0603, "100n, 0603", Case-EIA=0603, Case-Metric=1608, Manufacture 1=Kemet, Manufacture Part Number 1=C0603C104K5RACTU, Rated Voltage=50VDC, Supplier Part Number 1=399-5089-2-ND, Component Group=Capacitor, Component Type=Standard, Mounting Technology=SMT, Part Number=CCHIP-100n-0603, Pin Count=2, Supplier 1=Digi-Key
C5: library part CCHIP-2u2-0603, "2u2, 0603", Case-EIA=0603, Case-Metric=1608, Manufacture 1=Samsung, Manufacture Part Number 1=CL10B225KP8NNNC, Rated Voltage=10VDC, Supplier Part Number 1=1276-1134-2-ND, Component Group=Capacitor, Component Type=Standard, Mounting Technology=SMT, Part Number=CCHIP-2u2-0603, Pin Count=2, Supplier 1=Digi-Key
C6 C7 C8 C9 C10 C18 C22 C23 C25 C26: library part CCHIP-2u2-0603, "2u2, 0603", Case-EIA=0603, Case-Metric=1608, Manufacture 1=Samsung, Manufacture Part Number 1=CL10B225KP8NNNC, Rated Voltage=10VDC, Supplier Part Number 1=1276-1134-1-ND, Component Group=Capacitor, Component Type=Standard, Mounting Technology=SMT, Part Number=CCHIP-2u2-0603, Pin Count=2, Supplier 1=Digi-Key
C11 C12 C13 C14 C15 C16 C17 C19 C20 C21 C24 C27: library part CCHIP-100n-0402, "100n, 0402", Case-EIA=0402, Manufacture Part Number 1=CGA2B3X7R1V104K050BB, Supplier Part Number 1=445-6901-1-ND, Component Group=Capacitor, Component Type=Standard, Mounting Technology=SMT, Part Number=CCHIP-100n-0402, Pin Count=2, Supplier 1=Digi-Key
D1 D2: library part LEDCHIP_0603_RED, "Chip LED, Red", Manufacture 1=Kingbright, Manufacture Part Number 1=APT1608SRCPRV, Supplier Part Number 1=754-1122-1-ND, Component Group=Optical, Component Type=Standard, Mounting Technology=SMT, Part Number=LEDCHIP_0603_RED, Pin Count=2, PP Material Stack=15, PP Rotation=-90, Supplier 1=Digi-Key
FID1 FID2 FID3: "ROUND FIDUCIAL", Component Group="PCB Feature", Component Type="Standard (No BOM)", Part Number=FIDU-ROUND-1.0MM, Pin Count=0
MH1 MH2: library part MOUNT_#4_TIGHT, "Machine screw 4-40 Mounting Hole", Component Group=Mechanical, Component Type=Mechanical, Part Number=MOUNT_#4_TIGHT, Pin Count=1, PP Material Stack=0, PP Rotation=0
P1: library part CMP-0001-00031-2, "Golden finger, PCIeX4, Dual, Opposite, Pitch 1mm, 64-Position", ClassName="Edge Connector", Datasheet Version="rev2.0, Apr-2007", Mating Connector=Molex-87715-9106, Package Reference=PCIeX4-GF-2D-1000-1K-O64, Publisher=Altium
R1 R2 R3 R4 R5 R6 R7 R8: library part RCHIP-10R-0603, "10R res, 0603, 1%, 1/10W", Case-EIA=0603, Case-Metric=1608, Manufacture 1=Yageo, Manufacture Part Number 1=RC0603FR-0710RL, Rated Power=0.1W, Rated Voltage=75VDC, Supplier Part Number 1=311-10.0HRCT-ND, Temperature Range="-55C to 155C", Tolerance=1%, Component Group=Resistor, Component Type=Standard, Mounting Technology=SMT, Part Number=RCHIP-10R-0603, Pin Count=2, Supplier 1=Digi-Key
R9 R10 R11 R12 R13 R14 R22 R23: library part RCHIP-DNM-0603, "Do Not Mount Resistor", Case-EIA=0603, Case-Metric=1608, Component Group=Resistor, Component Type=Standard, Mounting Technology=SMT, Part Number=RCHIP-DNM-0603, Pin Count=2
R15 R16 R17: library part RCHIP-4K7-0603, "4k7 res, 0603, 1%, 1/10W", Case-EIA=0603, Case-Metric=1608, Manufacture 1=Yageo, Manufacture Part Number 1=RC0603FR-074K7L, Rated Power=0.1W, Rated Voltage=75VDC, Supplier Part Number 1=311-4.70KHRCT-ND, Temperature Range="-55C to 155C", Tolerance=1%, Component Group=Resistor, Component Type=Standard, Mounting Technology=SMT, Part Number=RCHIP-4K7-0603, Pin Count=2, Supplier 1=Digi-Key
R18 R19: library part RCHIP-1K-0603, "1k res, 0603, 1%, 1/10W", Case-EIA=0603, Case-Metric=1608, Manufacture 1=Yageo, Manufacture Part Number 1=RC0603FR-071KL, Rated Power=0.1W, Rated Voltage=75VDC, Supplier Part Number 1=311-1.00KHRCT-ND, Temperature Range="-55C to 155C", Tolerance=1%, Component Group=Resistor, Component Type=Standard, Mounting Technology=SMT, Part Number=RCHIP-1K-0603, Pin Count=2, Supplier 1=Digi-Key
R20 R21: library part RCHIP-10K-0603, "10k res, 0603, 1%, 1/10W", Case-EIA=0603, Case-Metric=1608, Manufacture 1=Yageo, Manufacture Part Number 1=RC0603FR-0710KL, Rated Power=0.1W, Rated Voltage=75VDC, Supplier Part Number 1=311-10.0KHRCT-ND, Temperature Range="-55C to 155C", Tolerance=1%, Component Group=Resistor, Component Type=Standard, Mounting Technology=SMT, Part Number=RCHIP-10K-0603, Pin Count=2, Supplier 1=Digi-Key
U1: library part CMP-0383-00012-1, "Artix-7 FPGA, 210 User I/Os, 0 GTP, 324-Ball BGA, Speed Grade 1, Commercial Grade, Pb-Free", Manufacturer=Xilinx, Operating Temperature Range=Commercial, Available User I/O=210, CMTs=5, ComponentLink1Description="Manufacturer URL", ComponentLink1URL=http://www.xilinx.com/, ComponentLink2Description=Datasheet, ComponentLink2URL=http://www.xilinx.com/support/documentation/data_sheets/ds180_7Series_Overview.pdf, ComponentLink3Description=Pinout, ComponentLink3URL=http://www.xilinx.com/support/documentation/user_guides/ug475_7Series_Pkg_Pinout.pdf, ComponentLink4Description="Package Specification", ComponentLink4URL=http://www.xilinx.com/support/documentation/user_guides/ug475_7Series_Pkg_Pinout.pdf, DatasheetVersion="Rev. 1.15", GTP=0, Logic Cells=33280, Maximum Distributed RAM="400 Kb", Mounting Technology="Surface Mount", PackageDescription="324-Ball Wire-Bond Chip-Scale BGA, Body 15 x 15 mm, Pitch 0.8 mm", PackageReference=CSG-324, PackageVersion="Rev. 1.11", PartNumber=XC7A35T-1CSG324C, Speed Grades=1, Total Block RAM="1800 Kb"
U2: "Regulator, Adj, LDO, 1A", Manufacture 1="Diodes Inc", Supplier Part Number 1=AP7361C-Y5-13DICT-ND, Component Group="Analog IC", Component Type=Standard, Manufacture Part Number 1=AP7361C-Y5-13, Part Number=AP7361C-Y5-13, Pin Count=5, PP Material Stack=0, PP Rotation=0, PP Rotation1=0, Supplier 1=Digi-Key

## Via types
v1: diameter 0.406, hole 0.203, Top Layer to Bottom Layer, tented both sides, 121 vias
v2: diameter 0.61, hole 0.305, Top Layer to Bottom Layer, tented both sides, 86 vias

## Nets (pads, with @x,y where several pads share a name; then routed paths per layer and width w, separated by ;. In a path a pad name is that pad's centre, name@x,y a point inside that pad or via, vN(x,y) a via of type N, cw(c..) or ccw(c..) an arc to the next point about the centre after c; other vN are vias at no path point)
BOOT_MODE: P1.B25 R17.2 U1.P9 | length 29.6
  Top Layer w0.127: P1.B25@98.525,94.135 P1.B25@98.525,96.127 ; v1(104.8,75.6) 106.274,75.6 106.403,75.471 106.403,74.797 U1.P9@106.8,74.4
  Top Layer w0.152: v1(98.468,92.964) ccw(c98.33,93.102) 98.525,93.102 P1.B25@98.525,94.135 ; R17.2@104,83.984 104,84.398 cw(c104.872,84.398) v1(104.255,85.015)
  Bottom Layer w0.127: 102.406,79.575 ccw(c102.8,79.573) 102.406,79.561 102.45,78.074 cw(c102.323,78.071) 102.45,78.071 ccw(c104.99,78.071) 103.194,76.275 103.368,76.1 ccw(c104.068,76.614) 103.454,76 ccw(c104.42,76.966) 104.42,75.6 v1(104.8,75.6)
  Bottom Layer w0.152: v1(98.468,92.964) 98.468,91.454 ccw(c101.008,91.454) 99.212,89.658 101.686,87.184 cw(c99.89,85.387) 102.43,85.387 102.43,83.835 ; 102.394,79.575 cw(c102.8,79.573) 102.42,79.718 ccw(c102.278,79.772) 102.43,79.771 102.43,83.835 ; v1(104.255,85.015) ccw(c104.255,83.457) 103.154,84.559 102.43,83.835
CLKIN: P1.B27 R8.1 | length 9.2
  Top Layer w0.152: R8.1@96.525,86.966 P1.B27@96.525,96.127
CLKOUT: P1.A29 R2.1 | length 11.2
  Top Layer w0.152: R2.1@93.929,85.661 93.929,86.251 cw(c95.639,86.251) 94.43,87.46 ccw(c92.634,89.256) 95.174,89.256 v1(95.174,91.669)
  Bottom Layer w0.152: P1.A29@94.525,96.127 94.525,92.317 ccw(c95.174,92.317) v1(95.174,91.669)
CS: P1.B26 U1.G18 | length 34.1
  Top Layer w0.127: P1.B26@97.525,96.127 97.525,93.288 ccw(c98.715,93.288) 97.874,92.447 cw(c97.033,91.606) 98.222,91.606 98.222,86.523 cw(c95.682,86.523) 97.478,84.727 96.269,83.518 ccw(c98.065,81.722) 95.525,81.722 95.525,80.933 cw(c95.256,80.664) 95.636,80.664 95.636,74.163 cw(c94.509,74.163) 95.306,73.366 ccw(c96.029,72.643) 95.006,72.643 95.006,69.211 ccw(c96.425,69.211) 95.422,68.208 ccw(c97.025,69.811) 97.025,67.544 ccw(c97.025,69.363) 98.311,68.077 98.635,68.4 cw(c99.6,67.435) U1.G18@99.6,68.8
FILT_HP: C3.1 C4.1 C5.1 P1.A3 P1.B2 P1.B4 R1.2 | length 59.2
  Top Layer w0.254: R1.2@117.83,85.255 117.83,84.059 ccw(c118,84.059) 118,83.889 cw(c118,83.413) 118.476,83.413 118.476,81.722 ccw(c118.917,81.722) 118.633,81.384 ccw(c118.796,81.578) 118.793,81.324 126.799,81.28 ccw(c126.799,81.731) 127.25,81.731 127.25,89.659 ccw(c126.996,89.658) 127.185,89.828 ccw(c126.799,89.479) 126.799,90 125.8,90 cw(c125.8,91.656) 124.144,91.656 124.144,93.106 ccw(c123.89,93.106) 124.026,93.321 ccw(c123.925,93.321) 123.925,93.421 cw(c123.925,93.821) 123.525,93.821 P1.B2@123.525,96.127
  Top Layer w0.508: P1.B4@121.525,96.127 v2(121.525,93.088) 121.525,92.402 cw(c121.018,92.43) 121.458,92.176 ccw(c122.05,91.831) 121.44,92.145 cw(c120.99,92.38) 120.995,91.872 120.903,91.872 ccw(c120.903,91.78) 120.811,91.78 120.811,88.681 ccw(c121.431,88.681) 121.431,88.06 125.998,88.06 cw(c125.998,87.552) 126.506,87.552 126.506,85.725 cw(c126.016,85.725) 126.016,85.235 C3.1@125.129,85.235
  Top Layer w0.635: R1.2@117.83,85.255 125.109,85.255 cw(c125.109,85.235) C3.1@125.129,85.235
  Bottom Layer w0.508: v2(121.525,93.088) ccw(c121.591,93.088) 121.591,93.022 122.296,93.022 ccw(c122.296,93.251) 122.525,93.251 P1.A3@122.525,96.127
FILTIN: C25.1 C26.1 C27.1 P1.B5 R22.1 U2.5 | length 32.3
  Top Layer w0.203: R22.1@129.2,75.678 129.2,76.289 cw(c129.3,76.289) 129.3,76.389 U2.5@131.2,76.389
  Top Layer w0.508: P1.B5@120.525,96.127 120.525,93.968 cw(c119.501,93.968) 120.478,93.66 cw(c119.994,93.814) 120.239,93.369 ccw(c120.566,92.767) 120.167,93.324 ccw(c120.566,92.767) 119.886,92.682 cw(c119.382,92.621) 119.878,92.515 119.644,91.403 ccw(c120.141,91.301) 119.74,90.99 cw(c119.2,90.567) 119.756,90.968 ccw(c120.166,91.268) 119.853,90.868 cw(c119.454,90.47) 120.018,90.47 120.018,87.818 ccw(c120.526,87.818) 120.505,87.31 ccw(c121.376,88.182) 121.376,86.949 v2(125.8,86.949) ; v2(128.651,86.868) 128.651,83.312 ccw(c128.981,83.312) 128.981,82.982 cw(c128.981,81.914) 130.049,81.914 C26.1@130.049,80.214 130.049,78.457 ccw(c130.34,78.457) C27.1@130.34,78.166 130.34,77.249 ccw(c131.2,77.249) U2.5@131.2,76.389
  Bottom Layer w0.508: v2(125.8,86.949) 128.57,86.949 cw(c128.57,86.868) v2(128.651,86.868)
FPGA_DONE: R15.2 R18.1 R21.1 U1.P10 | length 36.6
  Top Layer w0.127: v1(104.8,74.8) 105.6,74.8 U1.P10@106,74.4 ; v2(118,79.467) 117.834,79.467 ccw(c117.834,79.158) 117.525,79.158 117.525,78.628 cw(c117.398,78.629) 117.511,78.57 ccw(c117.948,78.338) 117.511,78.106 cw(c117.398,78.047) 117.525,78.048 117.525,76.54 ccw(c119.525,76.54) 119.525,74.54 122.383,74.54 ccw(c122.383,75.34) 123.183,75.34
  Top Layer w0.152: R21.1@122.05,76.022 v2(123.183,76.022) ; R18.1@124.525,73.544 124.525,74.287 ccw(c124.025,74.287) 124.025,74.787 123.736,74.787 cw(c123.736,75.34) 123.183,75.34 v2(123.183,76.022) ; R15.2@127.25,77.74 127.25,77.314 cw(c126.7,77.314) 126.7,76.764 123.925,76.764 ccw(c123.925,76.022) v2(123.183,76.022)
  Bottom Layer w0.127: v1(104.8,74.8) ccw(c104.8,75.996) 105.645,75.15 ccw(c104.8,75.996) 105.647,75.151 108.214,77.774 cw(c109.387,76.626) 108.227,77.786 109.421,78.98 cw(c109.6,78.8) 109.499,79.033 110.474,79.456 cw(c110.525,79.34) 110.525,79.467 v2(118,79.467)
FPGA_INITB: R16.2 R19.1 R20.1 U1.P7 | length 34.2
  Top Layer w0.127: U1.P7@108.4,74.4 108.4,74.453 108.427,74.453 108.76,74.787 v1(108.76,74.813) ; v2(117.948,78.338) 118.476,78.338 cw(c118.476,77.988) 118.825,77.988 ccw(c119.448,77.988) 119.448,77.366 122.66,77.366 ccw(c122.66,77.988) 123.283,77.988 123.283,78.9 ccw(c123.2,78.9) v2(123.2,78.983) ; R20.1@122.05,78.966 123.183,78.966 v2(123.2,78.983) ; R19.1@127.2,73.544 ccw(c127.2,73.594) 127.25,73.594 R16.2@127.25,75.6 127.25,75.866 cw(c128.067,75.866) 128.067,76.683 ccw(c128.067,77.316) 128.7,77.316 128.7,78.509 ccw(c128.143,78.509) 128.143,79.066 123.283,79.066 ccw(c123.283,78.983) v2(123.2,78.983)
  Bottom Layer w0.127: v1(108.76,74.813) 108.744,74.83 cw(c110.54,76.626) 108,76.626 cw(c109.387,76.626) 108.406,77.606 109.583,78.783 cw(c109.673,78.693) 109.622,78.81 110.527,79.202 cw(c110.578,79.086) 110.578,79.213 114.772,79.213 cw(c114.772,76.673) 116.568,78.469 ccw(c116.884,78.784) 116.884,78.338 v2(117.948,78.338) cw(c117.948,78.265) v2@118,78.317
GND: C1.2 C2.2 C3.2 C4.2 C5.2 C6.2 C7.2 C8.2 C9.2 C10.2 C11.2 C12.2 C13.2 C14.2 C15.2 C16.2 C17.2 C18.2 C19.2 C20.2 C21.2 C22.2 C23.2 C24.2 C25.2 C26.2 C27.2 MH1.1 MH2.1 P1.A1 P1.A2 P1.A8 P1.A20 P1.A27 P1.A28 P1.B3 P1.B9 P1.B15 P1.B21 P1.B22 R12.1 R13.1 R14.1 R23.2 U1.A2 U1.A12 U1.B5 U1.B15 U1.C8 U1.C18 U1.D1 U1.D11 U1.E4 U1.E14 U1.F7 U1.F9 U1.F11 U1.F17 U1.G8 U1.G10 U1.G12 U1.H3 U1.H7 U1.H9 U1.H11 U1.H13 U1.J6 U1.J8 U1.J12 U1.J16 U1.K7 U1.K11 U1.L2 U1.L8 U1.L12 U1.M5 U1.M7 U1.M9 U1.M11 U1.M15 U1.N8 U1.N10 U1.N12 U1.N18 U1.P1 U1.R4 U1.R14 U1.T7 U1.T17 U1.U10 U1.V3 U1.V13 U2.2 | length 109.8
  Top Layer w0.203: v2(98.361,65.6) U1.C18@99.6,65.6 ; v1(98.468,73.6) U1.N18@99.6,73.6 ; v1(100,67.601) U1.F17@100.4,68 ; v1@100.001,76.399 U1.T17@100.4,76 ; v1(100.8,70) U1.J16@101.2,70.4 ; v1(101.6,64.4) U1.B15@102,64.8 ; v1(101.6,73.2) U1.M15@102,72.8 ; v1(102.4,66.8) U1.E14@102.8,67.2 ; v1(102.4,75.6) U1.R14@102.8,75.2 ; v1(103.2,69.2) U1.H13@103.6,69.6 U1.J12@104.4,70.4 U1.K11@105.2,71.2 ; U1.V13@103.6,77.6 103.6,78.621 cw(c103.911,78.621) v2(103.911,78.933) 103.911,78.966 ccw(c103.85,79.027) 103.937,79.027 C15.2@103.937,79.918 ; v1(104,72.4) U1.L12@104.4,72 ; v1(104.4,62.8) U1.A12@104.4,64 ; U1.G12@104.4,68.8 v1(104.8,69.2) U1.H11@105.2,69.6 ; U1.N12@104.4,73.6 v1(104.8,73.2) U1.M11@105.2,72.8 ; U1.D11@105.2,66.4 v1(105.6,66) ; U1.F11@105.2,68 U1.G10@106,68.8 ; v1(105.6,74) U1.N10@106,73.6 ; U1.U10@106,76.8 v1(106.4,77.2) ; U1.F9@106.8,68 U1.G10@106,68.8 ; U1.M9@106.8,72.8 v1(107.2,72.4) U1.L8@107.6,72 ; U1.C8@107.6,65.6 v1(108,65.2) ; U1.G8@107.6,68.8 v1(108,68.4) U1.F7@108.4,68 ; U1.J8@107.6,70.4 v1(106.4,69.2) U1.G10@106,68.8 ; U1.N8@107.6,73.6 v1(108,74) ; U1.K7@108.4,71.2 v1(108.8,70.8) ; U1.M7@108.4,72.8 v1(108.8,73.2) ; U1.T7@108.4,76 v1(108.8,76.4) ; v1(108.8,69.2) U1.H7@108.4,69.6 U1.J6@109.2,70.4 ; U1.B5@110,64.8 v1(110.4,64.4) ; U1.M5@110,72.8 v1(110.4,73.2) ; U1.E4@110.8,67.2 v1(111.2,66.8) ; U1.R4@110.8,75.2 v1(111.2,75.6) ; U1.H3@111.6,69.6 v1(112,70) ; U1.V3@111.6,77.6 v1(111.6,78.8) ; v1(112.395,63.017) 112.4,63.022 U1.A2@112.4,64 ; U1.L2@112.4,72 v1(112.8,72.4) ; U1.D1@113.2,66.4 v1(114.198,66.4) ; U1.P1@113.2,74.4 v1(114.525,74.4)
  Top Layer w0.254: v2(97.478,68.391) C13.2@97.478,69.14
  Top Layer w0.305: P1.B22@101.525,96.127 101.525,93.662 101.766,93.421 v1(102,93.421) 102.321,93.421 102.525,93.625 P1.B21@102.525,96.127
  Top Layer w0.508: C9.2@90.392,73.971 90.392,72.846 v2(90.4,72.838) ; C14.2@90.68,60.339 v2(90.68,61.2) ; C21.2@95.306,65.6 95.318,65.612 95.318,66.515 v2(95.33,66.527) ; v2(96.681,59.15) 96.67,59.15 ccw(c97.179,59.659) 97.179,58.939 C8.2@97.815,58.939 ; v2(99.503,58.939) cw(c100.028,58.414) 100.028,59.157 C16.2@100.254,59.157 ; C17.2@100.294,80.47 v2(100.294,81.414) ; v2(107.95,57.6) C18.2@107.95,58.787 ; v1(108.182,93.288) ccw(c107.353,94.117) 108.525,94.117 P1.B15@108.525,96.127 ; v2(111.049,83.835) ccw(c110.902,83.982) 111.11,83.982 C1.2@111.11,84.6 ; C19.2@111.2,59.199 111.855,59.199 cw(c111.855,58.994) v2(112,59.139) ; C2.2@112.745,84.6 112.757,84.588 112.757,83.813 v2(112.768,83.801) ; P1.B9@116.525,96.127 116.525,93.127 ccw(c116.907,93.127) v2(116.637,92.857) ; v2(119.2,90.567) cw(c119.14,90.507) 119.225,90.507 C22.2@119.225,89.6 ccw(c118.973,89.852) C22.2@119.329,89.852 ; C20.2@120.018,67.2 v2(120.811,67.2) ; C11.2@120.06,69.6 v2(120.811,69.6) ; C12.2@120.12,61.2 v2(121.2,61.2) ; C6.2@120.225,73.2 v2(121.2,73.2) ; C7.2@120.3,64.4 v2(121.2,64.4) ; v2(120.811,82.917) C5.2@120.811,83.9 ; v2(122.05,91.831) ccw(c120.903,92.977) 122.525,92.977 P1.B3@122.525,96.127 ; v2(122.843,82.778) C4.2@122.843,83.835 ; C10.2@123.2,89.6 v2(123.2,90.688) ; v2(125.129,82.703) C3.2@125.129,83.835 ; v2(132.7,71.844) U2.2@132.7,73.089 ; v2(134.2,67.95) R23.2@134.2,69.15
  Bottom Layer w0.254: v2(89.2,74.912) cw(c89.261,74.851) 89.261,74.937 R12.1@90.384,74.937 ; v2(89.2,78.933) cw(c89.28,78.853) 89.28,78.966 R13.1@90.384,78.966 ; v2(89.2,83.2) R14.1@90.359,83.2
  Bottom Layer w0.305: P1.A20@103.525,96.127 103.6,94.18 v1(103.6,92.17) ; P1.A8@117.525,96.127 P1.A8@117.526,94.18 ; v1(123.52,91.656) 123.532,91.656 123.993,92.117 124.021,92.117 124.463,92.558 ccw(c124.206,92.723) 124.511,92.723 124.511,94.18 P1.A1@124.525,96.127 ; v1(123.52,92.634) 123.52,94.18 P1.A2@123.525,96.127
  Bottom Layer w0.508: P1.A28@95.525,96.127 95.525,94.818 ccw(c98.065,94.818) 96.269,93.022 96.525,92.766 ; P1.A27@96.525,96.127 96.525,92.766 ; v2(97.234,90.43) ccw(c97.13,90.326) 97.13,90.474 cw(c98.589,91.933) 96.525,91.933 96.525,92.766
  Bottom Layer w0.635: P1.A8@117.525,96.127 117.525,92.972 ccw(c118.483,92.972) 117.806,92.294 cw(c117.806,91.504) 118.365,92.063 118.733,91.694 cw(c117.606,90.567) v2(119.2,90.567)
  other v1: 100.001,76.4
  other v2: 132.7,77.366 132.7,78.57 132.5,80.123 132.5,81.949 129.7,89.062 134.501,89.062 129.7,94.034 134.501,94.034 80.569,95.925 85.37,95.925
GPIO1_TX: P1.B16 U1.V10 | length 20.3
  Top Layer w0.127: U1.V10@106,77.6 106,79.158 ccw(c104.634,79.158) 105.6,80.123 cw(c105.781,80.304) 105.525,80.304 105.525,89.589 ccw(c105.398,89.589) 105.521,89.621 105.419,90.001 ccw(c104.431,89.736) 105.264,90.33 104.824,90.948 cw(c104.927,91.022) 104.8,91.022 cw(c106.51,91.021) 105.301,92.23 105.518,92.447 cw(c106.766,91.198) 106.766,92.964 ccw(c106.766,93.503) 107.147,93.122 ccw(c106.236,94.034) 107.525,94.034 P1.B16@107.525,96.127
GPIO2_RX: P1.B17 U1.V11 | length 19.7
  Top Layer w0.127: U1.V11@105.2,77.6 105.245,79.327 ccw(c104.75,79.34) 105.245,79.342 105.2,89.736 ; 105.2,89.736 ccw(c104.431,89.736) 104.975,90.28 104.856,90.399 cw(c105.656,91.198) 104.525,91.198 cw(c106.43,91.198) 105.083,92.545 105.626,93.089 cw(c106,92.715) 106,93.243 ccw(c106,93.85) 106.429,93.421 ccw(c106.196,93.654) 106.525,93.654 P1.B17@106.525,96.127
GPIO3: P1.B18 R20.2 U1.V12 | length 36.4
  Top Layer w0.127: U1.V12@104.4,77.6 104.4,78.592 cw(c105.2,78.592) 104.634,79.158 ccw(c104.099,79.693) 104.856,79.693 104.856,89.479 ccw(c104.255,89.479) 104.68,89.904 cw(c104.771,89.994) 104.652,89.948 104.363,90.703 cw(c105.656,91.198) 104.271,91.198 cw(c106.43,91.198) 104.638,92.402 104.943,92.857 cw(c105.049,92.786) 104.959,92.876 ccw(c103.591,94.243) 105.525,94.243 P1.B18@105.525,96.127
  Top Layer w0.203: v2(119.2,78.983) ccw(c119.241,79.024) 119.241,78.966 R20.2@120.35,78.966
  Bottom Layer w0.152: v2(104.75,79.34) 105.466,80.056 cw(c107.262,78.26) 107.262,80.8 117.825,80.8 cw(c117.825,79.613) 118.664,80.452 118.8,80.317 cw(c117.834,79.351) 119.2,79.351 v2(119.2,78.983)
GPIO4: P1.B19 R21.2 U1.V14 | length 42.3
  Top Layer w0.127: U1.V14@102.8,77.6 v1(102.8,79.573) 102.8,83.219 cw(c105.34,83.219) 103.544,85.015 ccw(c102.443,86.116) 104,86.116 104,91.82 cw(c105.366,91.82) 104.4,92.786 ccw(c104.098,93.088) 104.525,93.088 P1.B19@104.525,96.127
  Top Layer w0.203: v2(119.14,76.1) ccw(c119.329,76.289) 119.329,76.022 R21.2@120.35,76.022
  Bottom Layer w0.152: v1(102.8,79.573) 102.8,79.334 ccw(c104.43,79.334) 103.278,78.181 ccw(c103.937,78.84) 103.937,77.908 ccw(c103.937,79.704) 105.207,78.434 106.346,79.573 cw(c108.142,77.777) 108.142,80.317 117.497,80.317 ccw(c117.497,80.78) 117.825,80.452 cw(c117.945,80.359) 117.967,80.509 cw(c117.825,79.613) 118.4,80.315 cw(c118.304,80.197) 118.413,80.303 cw(c117.762,79.678) 118.664,79.678 118.664,77.248 ccw(c120.288,77.248) v2(119.14,76.1)
HDR1: P1.A9 U1.L1 | length 38
  Top Layer w0.127: U1.L1@113.2,72 114.385,72 ccw(c114.385,74.54) 116.181,72.744 116.526,73.089 ccw(c114.787,74.828) 117.246,74.828 ccw(c117.119,74.828) 117.246,74.83 117.199,78.328 cw(c117.948,78.338) 117.199,78.35 117.246,81.225 ccw(c117.119,81.227) 117.246,81.227 ccw(c115.159,81.227) 116.635,82.703 ccw(c115.131,81.199) 115.131,83.327 ccw(c115.131,83.2) 115.125,83.326 115.12,83.326 112.779,83.162 cw(c112.745,83.656) 112.69,83.164 ccw(c112.675,83.038) 112.688,83.164 110.997,83.342 cw(c111.049,83.835) 110.823,83.394 110.078,83.776 cw(c110.136,83.889) 110.009,83.889 110.009,86.993 cw(c110.547,86.993) 110.167,87.374 ccw(c109.999,87.565) 110.168,87.375 110.667,87.811 cw(c110.75,87.715) 110.732,87.841 113.21,87.841 ccw(c113.21,90.381) 115.007,88.585 116.219,89.798 ccw(c115.212,90.805) v1(116.637,90.805)
  Bottom Layer w0.127: P1.A9@116.525,96.127 116.574,94.091 ccw(c116.701,94.091) 116.574,94.089 116.589,93.457 cw(c116.462,93.454) 116.498,93.332 ccw(c116.637,92.857) 116.536,92.372 cw(c116.51,92.247) 116.637,92.248 v1(116.637,90.805)
HDR2: P1.A10 U1.M1 | length 35.4
  Top Layer w0.127: U1.M1@113.2,72.8 114.157,72.8 ccw(c114.157,75.34) 115.953,73.544 ccw(c114.302,75.195) 116.637,75.195 116.637,80.393 ccw(c114.097,80.393) 115.893,82.189 115.588,82.494 ccw(c114.656,81.561) 114.656,82.88 114.427,82.88 cw(c114.427,83.007) 114.421,82.88 114.419,82.88 113.925,82.906 cw(c113.932,83.033) 113.921,82.906 ; 113.92,82.906 ccw(c113.669,80.123) 113.669,82.917 ccw(c113.669,82.536) 113.665,82.917 112.753,82.907 cw(c112.745,83.656) 112.741,82.907 111.128,82.917 ccw(c111.126,82.536) 111.126,82.917 cw(c111.126,84.927) 110.173,83.158 109.763,83.568 cw(c110.155,83.961) 109.6,83.961 109.6,86.61 cw(c109.727,86.61) 109.606,86.648 109.792,87.234 cw(c110.547,86.993) 109.986,87.552 cw(c110.167,87.374) 109.999,87.565 110.851,88.309 ccw(c110.768,88.405) 110.858,88.315 cw(c111.257,87.915) 111.257,88.481 112.73,88.481 ccw(c112.73,91.021) 114.526,89.225 115.537,90.236 ccw(c114.968,90.805) v1(115.773,90.805)
  Bottom Layer w0.127: 115.525,93.189 cw(c115.398,93.19) 115.512,93.134 115.206,92.519 ccw(c115.649,92.298) 115.245,92.012 115.75,91.303 cw(c115.646,91.229) 115.773,91.229 v1(115.773,90.805) ; 115.525,93.19 P1.A10@115.525,96.127
HDR3: P1.A11 U1.N1 | length 33.1
  Top Layer w0.127: U1.N1@113.2,73.6 113.673,73.6 ccw(c113.673,76.14) 115.469,74.344 ccw(c113.873,75.94) 116.13,75.94 116.13,80.399 ccw(c114.064,80.399) 115.525,81.86 115.465,81.919 ccw(c113.669,80.123) 113.669,82.663 ccw(c113.669,82.536) 113.668,82.663 112.756,82.653 cw(c112.745,83.656) 112.739,82.653 111.128,82.663 ccw(c111.126,82.536) 111.126,82.663 cw(c111.126,84.927) 109.525,83.327 cw(c110.266,84.068) 109.218,84.068 109.218,86.264 cw(c111.758,86.264) 109.962,88.06 110.382,88.481 cw(c111.785,87.077) 111.785,89.062 112.127,89.062 ccw(c112.127,91.602) 113.923,89.806 v1(114.923,90.805)
  Bottom Layer w0.127: P1.A11@114.525,96.127 114.525,93.618 ccw(c115.368,93.618) 114.772,93.022 cw(c114.408,92.658) 114.923,92.658 cw(c114.796,92.658) 114.922,92.65 114.902,92.349 ccw(c115.649,92.298) 114.9,92.287 v1(114.923,90.805)